# Altium PCB CellVoltageControl.PcbDoc (part 2 of 3)
Units mm, origin at the board's own origin, x right, y up, seen from the top; angles counter-clockwise.
Board outline 100.01 x 50.02 mm, 2 copper layers (Top Layer, Bottom Layer); 240 components, 246 nets, 730 pads, 332 vias.
Unrouted connection lines stored in the file: 5.
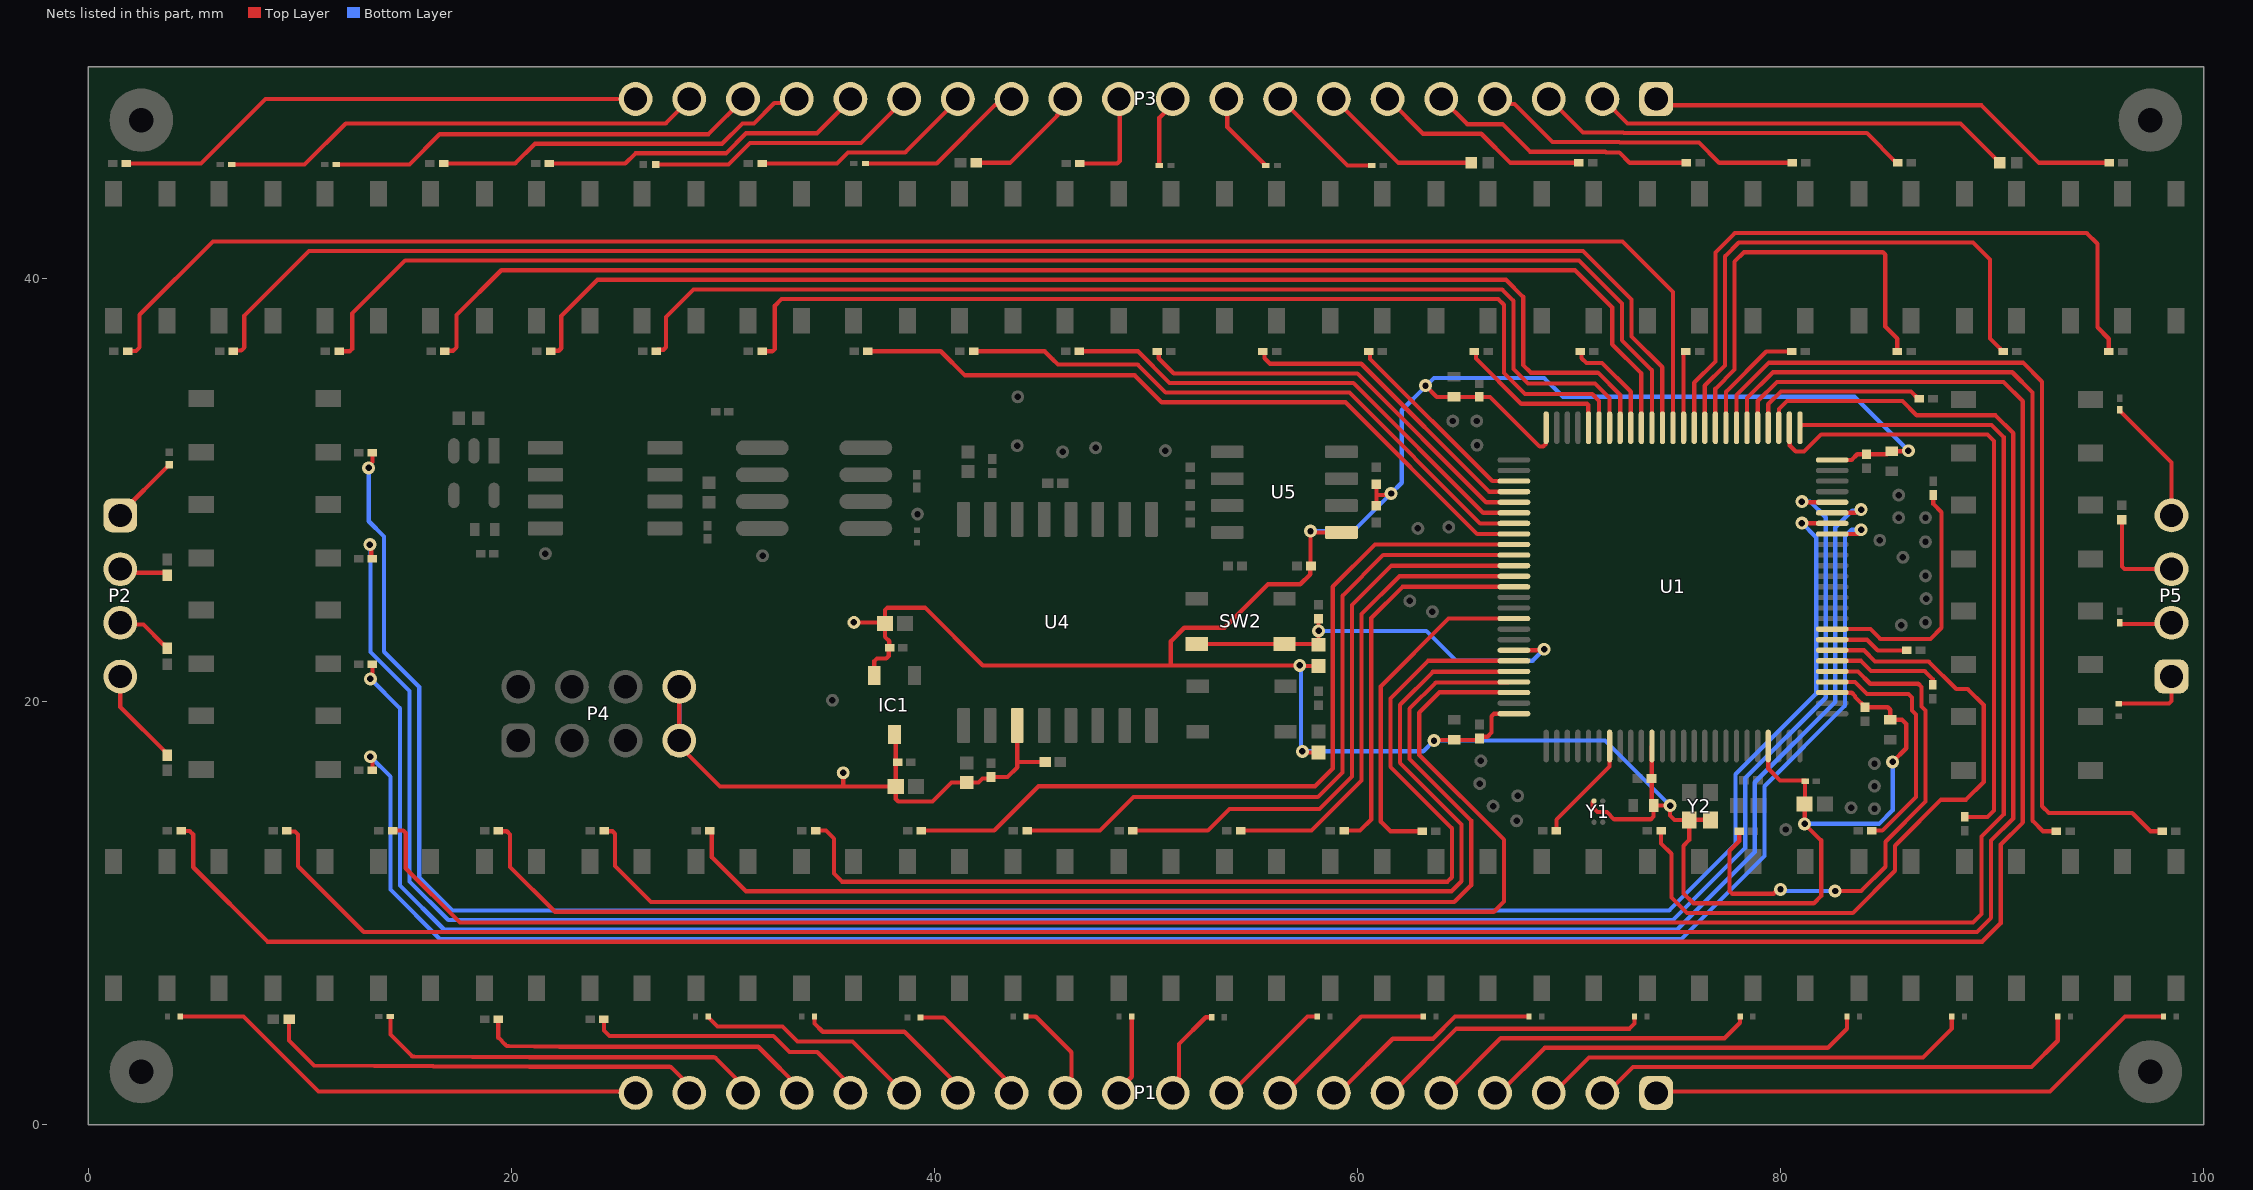
[diagram p2: the nets of this part, all layers, seen from the top]

## Part data (continued)
R1_CellSelectModule1 R1_CellSelectModule2 R1_CellSelectModule3 R1_CellSelectModule4 R1_CellSelectModule5 R1_CellSelectModule6 R1_CellSelectModule7 R1_CellSelectModule8 R1_CellSelectModule9 R1_CellSelectModule10 R1_CellSelectModule11 R1_CellSelectModule12 R1_CellSelectModule13 R1_CellSelectModule14 R1_CellSelectModule15 R1_CellSelectModule16 R1_CellSelectModule17 R1_CellSelectModule18 R1_CellSelectModule19 R1_CellSelectModule20 R1_CellSelectModule21 R1_CellSelectModule22 R1_CellSelectModule23 R1_CellSelectModule24 R1_CellSelectModule25 R1_CellSelectModule26 R1_CellSelectModule27 R1_CellSelectModule28 R1_CellSelectModule29 R1_CellSelectModule30 R1_CellSelectModule31 R1_CellSelectModule32 R1_CellSelectModule33 R1_CellSelectModule34 R1_CellSelectModule35 R1_CellSelectModule36 R1_CellSelectModule37 R1_CellSelectModule38 R1_CellSelectModule39 R1_CellSelectModule40 R1_CellSelectModule41 R1_CellSelectModule42 R1_CellSelectModule43 R1_CellSelectModule44 R1_CellSelectModule45 R1_CellSelectModule46 R1_CellSelectModule47 R1_CellSelectModule48 R39: library part CMP-2004-03546-1, Manufacturer=Panasonic, Part Number=ERJ1GNF4302C
R2 R50: library part ERJ-1GNF1001C, "Resistor", Manufacturer_Name=Panasonic, Mouser Part Number=667-ERJ-1GNF1001C, Arrow Part Number=ERJ-1GNF1001C, Arrow Price/Stock=https://www.arrow.com/en/products/erj-1gnf1001c/panasonic?utm_currency=USD&region=nac, Datasheet Link=https://industrial.panasonic.com/cdbs/www-data/pdf/RDA0000/AOA0000C301.pdf, Height=0.26mm, Manufacturer_Part_Number=ERJ-1GNF1001C, Mouser Price/Stock=https://www.mouser.co.uk/ProductDetail/Panasonic/ERJ-1GNF1001C?qs=nuXzIS8loXFEaL2ux1uJzQ%3D%3D
R3: library part ERJ-1GNF2492C, "Resistor", Manufacturer_Name=Panasonic, Mouser Part Number=667-ERJ-1GNF2492C, Datasheet Link=https://industrial.panasonic.com/cdbs/www-data/pdf/RDA0000/AOA0000C301.pdf, Height=0.26mm, Manufacturer_Part_Number=ERJ-1GNF2492C, Mouser Price/Stock=https://www.mouser.com/Search/Refine.aspx?Keyword=667-ERJ-1GNF2492C
R4: library part CMP-1010-00609-2, Manufacturer=Panasonic, Part Number=ERJ1GNF5102C
R5: library part CMP-1010-00629-2, Manufacturer=Panasonic, Part Number=ERJ-1GNF7682C
R6: library part CMP-2004-03538-1, Manufacturer=Panasonic, Part Number=ERJ1GNF3001C
R7: library part ERJ-1GNF2702C, "Resistor", Manufacturer_Name=Panasonic, Mouser Part Number=667-ERJ-1GNF2702C, Datasheet Link=https://industrial.panasonic.com/cdbs/www-data/pdf/RDA0000/AOA0000C301.pdf, Height=0.26mm, Manufacturer_Part_Number=ERJ-1GNF2702C, Mouser Price/Stock=https://www.mouser.com/Search/Refine.aspx?Keyword=667-ERJ-1GNF2702C
R8: library part CMP-1010-00612-1, "53K6 0.05W 1% 0201 (0603 Metric)  SMD", Case-EIA=0201, Case-Metric=0603, Power="0.05 W", Tolerance="1 %", Technology=SMT
R9: library part CMP-2004-03417-1, Manufacturer=Panasonic, Part Number=ERJ-1GNF7872C
R10: library part CMP-2004-03370-1, Manufacturer=Panasonic, Part Number=ERJ-1GNF4991C
R11: library part ERJ-1GNF2942C, "Resistor", Manufacturer_Name=Panasonic, Mouser Part Number=667-ERJ-1GNF2942C, Arrow Part Number=ERJ-1GNF2942C, Arrow Price/Stock=https://www.arrow.com/en/products/erj-1gnf2942c/panasonic, Datasheet Link=https://industrial.panasonic.com/cdbs/www-data/pdf/RDA0000/AOA0000C301.pdf, Height=0.26mm, Manufacturer_Part_Number=ERJ-1GNF2942C, Mouser Price/Stock=https://www.mouser.co.uk/ProductDetail/Panasonic/ERJ-1GNF2942C?qs=nuXzIS8loXGe%252BX5VKurVfQ%3D%3D
R12: library part CMP-1010-00613-2, Manufacturer=Panasonic, Part Number=ERJ-1GNF5492C
R13: library part CMP-1010-00631-1, "80K6 0.05W 1% 0201 (0603 Metric)  SMD", Case-EIA=0201, Case-Metric=0603, Power="0.05 W", Tolerance="1 %", Technology=SMT
R14: library part CMP-2004-03407-1, Manufacturer=Panasonic, Part Number=ERJ-1GNF6981C
R15: library part ERJ-1GNF3092C, "Resistor", Manufacturer_Name=Panasonic, Mouser Part Number=667-ERJ-1GNF3092C, Datasheet Link=https://industrial.panasonic.com/cdbs/www-data/pdf/RDA0000/AOA0000C301.pdf, Height=0.26mm, Manufacturer_Part_Number=ERJ-1GNF3092C, Mouser Price/Stock=https://www.mouser.com/Search/Refine.aspx?Keyword=667-ERJ-1GNF3092C
R16: library part CMP-2004-03020-1, Manufacturer=Panasonic, Part Number=ERJ-1GEF5762C
R17: library part CMP-1010-00633-2, Manufacturer=Panasonic, Part Number=ERJ-1GNF8252C
R18: library part CMP-2004-03433-1, Manufacturer=Panasonic, Part Number=ERJ-1GNF9091C
R19: library part ERJ-1GNF3302C, "Resistor", Manufacturer_Name=Panasonic, Mouser Part Number=667-ERJ-1GNF3302C, Datasheet Link=https://industrial.panasonic.com/cdbs/www-data/pdf/RDA0000/AOA0000C301.pdf, Height=0.26mm, Manufacturer_Part_Number=ERJ-1GNF3302C, Mouser Price/Stock=https://www.mouser.co.uk/ProductDetail/Panasonic/ERJ-1GNF3302C?qs=nuXzIS8loXGkny9nADUO%252BQ%3D%3D
R20: library part CMP-2004-03025-1, Manufacturer=Panasonic, Part Number=ERJ-1GEF5902C
R21: library part CMP-2004-03424-1, Manufacturer=Panasonic, Part Number=ERJ-1GNF8452C
R22: library part ERJ-1GNF1102C, "Resistor", Manufacturer_Name=Panasonic, Datasheet Link=https://industrial.panasonic.com/cdbs/www-data/pdf/RDA0000/AOA0000C301.pdf, Height=0.26mm, Manufacturer_Part_Number=ERJ-1GNF1102C
R23: library part ERJ-1GNF3482C, "Resistor", Manufacturer_Name=Panasonic, Mouser Part Number=667-ERJ-1GNF3482C, Datasheet Link=https://industrial.panasonic.com/cdbs/www-data/pdf/RDA0000/AOA0000C301.pdf, Height=0.26mm, Manufacturer_Part_Number=ERJ-1GNF3482C, Mouser Price/Stock=https://www.mouser.com/Search/Refine.aspx?Keyword=667-ERJ-1GNF3482C
R24: library part CMP-2004-03397-1, Manufacturer=Panasonic, Part Number=ERJ-1GNF6192C
R25: library part CMP-1010-00635-2, Manufacturer=Panasonic, Part Number=ERJ-1GNF8662C
R26: library part ERJ-1GNF1302C, "Resistor", Manufacturer_Name=Panasonic, Arrow Part Number=ERJ-1GNF1302C, Arrow Price/Stock=https://www.arrow.com/en/products/erj-1gnf1302c/panasonic, Datasheet Link=https://industrial.panasonic.com/cdbs/www-data/pdf/RDA0000/AOA0000C301.pdf, Height=0.26mm, Manufacturer_Part_Number=ERJ-1GNF1302C
R27: library part ERJ-1GNF3742C, "Resistor", Manufacturer_Name=Panasonic, Mouser Part Number=667-ERJ-1GNF3742C, Arrow Part Number=ERJ-1GNF3742C, Arrow Price/Stock=https://www.arrow.com/en/products/erj-1gnf3742c/panasonic?utm_currency=USD&region=nac, Datasheet Link=https://industrial.panasonic.com/cdbs/www-data/pdf/RDA0000/AOA0000C301.pdf, Height=0.26mm, Manufacturer_Part_Number=ERJ-1GNF3742C, Mouser Price/Stock=https://www.mouser.co.uk/ProductDetail/Panasonic/ERJ-1GNF3742C?qs=nuXzIS8loXEad9H565qrAg%3D%3D
R28: library part CMP-1010-00620-1, "63K4 0.05W 1% 0201 (0603 Metric)  SMD", Case-EIA=0201, Case-Metric=0603, Power="0.05 W", Tolerance="1 %", Technology=SMT
R29: library part CMP-2004-03430-1, Manufacturer=Panasonic, Part Number=ERJ-1GNF8872C
R30: library part ERJ-1GJF1502C, "Resistor", Manufacturer_Name=Panasonic, Mouser Part Number=667-ERJ-1GJF1502C, Arrow Part Number=ERJ-1GJF1502C, Arrow Price/Stock=https://www.arrow.com/en/products/erj-1gjf1502c/panasonic?utm_currency=USD&region=nac, Datasheet Link=https://industrial.panasonic.com/cdbs/www-data/pdf/RDA0000/AOA0000C304.pdf, Height=0.26mm, Manufacturer_Part_Number=ERJ-1GJF1502C, Mouser Price/Stock=https://www.mouser.co.uk/ProductDetail/Panasonic/ERJ-1GJF1502C?qs=OcgtsXO%252B3gsxVA8R4OwezA%3D%3D
R31: library part ERJ-1GNF3902C, "Resistor", Manufacturer_Name=Panasonic, Mouser Part Number=667-ERJ-1GNF3902C, Arrow Part Number=ERJ-1GNF3902C, Arrow Price/Stock=https://www.arrow.com/en/products/erj-1gnf3902c/panasonic, Datasheet Link=https://industrial.panasonic.com/cdbs/www-data/pdf/RDA0000/AOA0000C301.pdf, Height=0.26mm, Manufacturer_Part_Number=ERJ-1GNF3902C, Mouser Price/Stock=https://www.mouser.co.uk/ProductDetail/Panasonic/ERJ-1GNF3902C?qs=nuXzIS8loXHDGgRLL9kxuw%3D%3D
R32: library part CMP-2004-03399-1, Manufacturer=Panasonic, Part Number=ERJ-1GNF6492C
R33: library part CMP-2004-03561-1, Manufacturer=Panasonic, Part Number=ERJ1GNF9102C
R34: library part ERJ-1GNF1692C, "Resistor", Manufacturer_Name=Panasonic, Mouser Part Number=667-ERJ-1GNF1692C, Datasheet Link=https://industrial.panasonic.com/cdbs/www-data/pdf/RDA0000/AOA0000C301.pdf, Height=0.26mm, Manufacturer_Part_Number=ERJ-1GNF1692C, Mouser Price/Stock=https://www.mouser.co.uk/ProductDetail/Panasonic/ERJ-1GNF1692C?qs=nuXzIS8loXF5YjzhgcakNQ%3D%3D
R35: library part ERJ-1GNF4122C, "Resistor", Manufacturer_Name=Panasonic, Datasheet Link=https://industrial.panasonic.com/cdbs/www-data/pdf/RDA0000/AOA0000C301.pdf, Height=0.26mm, Manufacturer_Part_Number=ERJ-1GNF4122C
R36: library part CMP-2004-03066-1, Manufacturer=Panasonic, Part Number=ERJ-1GEF6982C
R37: library part CMP-1010-00639-1, "93K1 0.05W 1% 0201 (0603 Metric)  SMD", Case-EIA=0201, Case-Metric=0603, Power="0.05 W", Tolerance="1 %", Technology=SMT
R38: library part ERJ-1GNF1912C, "Resistor", Manufacturer_Name=Panasonic, Mouser Part Number=667-ERJ-1GNF1912C, Datasheet Link=https://industrial.panasonic.com/cdbs/www-data/pdf/RDA0000/AOA0000C301.pdf, Height=0.26mm, Manufacturer_Part_Number=ERJ-1GNF1912C, Mouser Price/Stock=https://www.mouser.com/Search/Refine.aspx?Keyword=667-ERJ-1GNF1912C
R40: library part CMP-1010-00626-2, Manufacturer=Panasonic, Part Number=ERJ-1GNF7152C
R41: library part CMP-2004-03438-1, Manufacturer=Panasonic, Part Number=ERJ-1GNF9532C
R42: library part ERJ-1GNF2102C, "Resistor", Manufacturer_Name=Panasonic, Mouser Part Number=667-ERJ-1GNF2102C, Datasheet Link=https://industrial.panasonic.com/cdbs/www-data/pdf/RDA0000/AOA0000C301.pdf, Height=0.26mm, Manufacturer_Part_Number=ERJ-1GNF2102C, Mouser Price/Stock=https://www.mouser.co.uk/ProductDetail/Panasonic/ERJ-1GNF2102C?qs=nuXzIS8loXF4rN4MRKzadQ%3D%3D
R43: library part CMP-1010-00603-1, "45K3 0.05W 1% 0201 (0603 Metric)  SMD", Case-EIA=0201, Case-Metric=0603, Power="0.05 W", Tolerance="1 %", Technology=SMT
R44: library part CMP-2004-03413-1, Manufacturer=Panasonic, Part Number=ERJ-1GNF7322C
R45: library part CMP-1010-00641-2, Manufacturer=Panasonic, Part Number=ERJ-1GNF9762C
R46: library part ERJ-1GNF2322C, "Resistor", Manufacturer_Name=Panasonic, Datasheet Link=https://industrial.panasonic.com/cdbs/www-data/pdf/RDA0000/AOA0000C301.pdf, Height=0.26mm, Manufacturer_Part_Number=ERJ-1GNF2322C
R47: library part CMP-2004-02976-1, Manufacturer=Panasonic, Part Number=ERJ-1GEF4872C
R48: library part CMP-1010-00628-2, Manufacturer=Panasonic, Part Number=ERJ1GNF7502C
R49 R53 R54: library part CMP-2004-03446-2, "RES SMD 100K OHM 1% 1/20W 0201", Case Code (Imperial)=0201, Case Code (Metric)=0603, Max Operating Temperature=125°C, Max Power Dissipation=50mW, Min Operating Temperature=-55°C, Package Quantity=15000, Resistance=100kR, Temperature Coefficient=200ppm/°C, Tolerance=1%, Voltage Rating=25V, Case/Package=0201, Composition="Thick Film", Contact Plating=Tin, Height=0.01inch, Lead Free="Lead Free", Length=0.024inch, Mount="Surface Mount", Number of Pins=2, Number of Terminations=2, Packaging="Tape and Reel", Power Rating=50mW, Radiation Hardening=No, REACH SVHC="No SVHC", Termination=SMD/SMT, Voltage Rating (DC)=25V, Weight=6E-06oz, Width=0.012inch
R51 R52: library part CMP-2002-00433-1, Manufacturer=Panasonic, Part Number=ERJ-2GEJ103X
R55 R56 R57 R58: library part CMP-2002-01154-4, "Chip Resistor, 4.7 KOhm, +/- 1%, 0.1 W, -55 to 155 degC, 0402 (1005 Metric), RoHS, Tape and Reel", Case Code (Imperial)=0402, Case Code (Metric)=1005, Max Operating Temperature="155 degC", Min Operating Temperature="-55 degC", Package Quantity=1, PartNumber=ERJ-2RKF4701X, Power Rating="100 mW", Resistance="4.7 KOhm", Tolerance=1%, Voltage Rating="50 V", Case\/Package=0402, ComponentLink1Description="Manufacturer URL", ComponentLink1URL=http://www.panasonic.com/, ComponentLink2Description=Datasheet, ComponentLink2URL=http://industrial.panasonic.com/cdbs/www-data/pdf/RDA0000/AOA0000C86.pdf, DatasheetVersion=04/2015, Height="0.35 mm", Length="1 mm", Mount="Surface Mount", Mounting Technology="Surface Mount", PackageDescription="2-Pin Surface Mount Device, Body 1 x 0.5 mm", PackageReference=0402, Packaging="Cut Tape", Pins=2, Radiation Hardening=No, REACH SVHC=Yes, RoHSCompliant=true, Width="0.5 mm"
SW1 SW2: library part CMP-10040-000001-2, "SWITCH TACTILE SPST-NO 0.05A 16V", Case/Package=SMD/SMT, Color=Black, Current Rating=50mA, Max Operating Temperature=85°C, Min Operating Temperature=-40°C, Operating Force=160gf, Package Quantity=2900, Voltage Rating (DC)=16V, Actuator Type=Standard, Contact Plating=Silver, Depth=4.6mm, Illumination Type=Non-Illuminated, Lead Free="Lead Free", Length=3.2mm, Max Current Rating=50mA, Mechanical Life=150000Cycles, Mount="Surface Mount", Orientation=Straight, Packaging="Tape and Reel", RoHS Compliant=Yes, Switch Function=Off-Mom, Switch Travel=0.15mm, Termination=J-Bend, Throw Configuration=SPST
U1: library part CMP-0236-00227-2, "ARM Cortex-M3 32-bit MCU, 128 KB Flash, 32 KB Internal RAM, 83 I/Os, 100-Pin LQFP, -40 to 85 degC, Tape and Reel", I/Os (High Current)=82, Manufacturer=STMicroelectronics, Operating Frequency(F) (Processor speed) (MHz)=32, Package Description="100-Pin Low Profile Quad Flat Package, Body 14 x 14 mm, Pitch 0.5 mm", Package Reference=LQFP100, Supply Voltage(Vcc) min (V)=1.8, ComponentLink1Description="Manufacturer URL", ComponentLink1URL=http://www.st.com/, ComponentLink2Description=Datasheet, ComponentLink2URL=http://www.st.com/st-web-ui/static/active/en/resource/technical/document/datasheet/DM00078689.pdf, Core="ARM Cortex-M3", D/A Converter=2, Data E2PROM nom (B)=4096, DatasheetVersion="Rev. 4", FLASH Size (Prog) (kB)=128, Internal RAM Size (kB)=32, Mounting Technology="Surface Mount", Packing="Tape and Reel", PartNumber=STM32L152VBT6ATR
U2: library part CMP-0271-00145-3, "High-Speed, Single-Supply, Rail-to-Rail Operational Amplifier MicroAmplifier(TM) Series, 2.7 to 5.5 V, -40 to 85 degC, 8-pin SOIC (D8), Green (RoHS & no Sb/Br)", Manufacturer="Texas Instruments", Total Supply Voltage(Max)(+5V is 5, +/-5V is 10)=5.5, Total Supply Voltage(Min)(+5V is 5, +/-5V is 10)=2.7, CMRR(Min)(dB)=66, Code_JEDEC=MS-012, ComponentLink1Description="Manufacturer URL", ComponentLink1URL=http://www.ti.com/, ComponentLink2Description=Datasheet, ComponentLink2URL=http://www.ti.com/general/docs/lit/getliterature.tsp?genericPartNumber=OPA350&fileType=pdf, ComponentLink3Description="Package Specification", ComponentLink3URL=http://www.ti.com/litv/pdf/msoi002j, DatasheetVersion=SBOS099C, Eco-Plan="Green (RoHS & no Sb/Br)", IIB(Max)(pA)=10, Iq per channel(Max)(mA)=8.5, Mounting Technology="Surface Mount", Number of Channels=1, Offset Drift(Typ)(uV/C)=4, PackageDescription="8-Pin Plastic Small Outline, Body 4.9 x 3.9 mm, Pitch 1.27 mm", PackageReference=D0008A, PackageVersion="4040047-3/M, 06/2011", PartNumber=OPA350UA, Slew Rate(Typ)(V/us)=22, Sub Family="Low Input Bias Current Amp (<=10pA), Low Offset Voltage Amplifier (<=500uV), Low Supply Voltage Amplifier (<=2.7V), Precision Amplifier", Vio (25C)(Max)(mV)=1, Vn at 1kHz(Typ)(nV/rtHz)=18
U3: library part CMP-0074-00531-5, "IC VREF SERIES 0.05% SOT23-5", Case/Package=SOT-23, Dropout Voltage=175mV, Max Input Voltage=6V, Max Operating Temperature=125°C, Max Output Current=20mA, Max Output Voltage=2.5V, Max Supply Voltage=2.2V, Min Operating Temperature=-40°C, Nominal Supply Current=60uA, Operating Supply Current=100uA, Package Quantity=1000, Temperature Coefficient=20ppm/°C, Tolerance=0.05%, Height=1.02mm, Lead Free="Lead Free", Length=2.92mm, Min Input Voltage=2.2V, Min Output Voltage=2.5V, Mount="Surface Mount", Number of Channels=1, Number of Pins=5, Output Current=20mA, Output Type=Fixed, Output Voltage=2.5V, Packaging="Tape and Reel", Quiescent Current=100uA, Radiation Hardening=No, REACH SVHC="No SVHC", Reference Type=Series, Reference Voltage=2.5V, Series=-, Supply Current=60uA, Termination=SMD/SMT, Width=1.6mm
U4: library part CMP-04910-000064-1, "DC DC CONVERTER 3.3V 5V 500MW"
U5: library part CMP-04872-000011-1, "DGTL ISO 2.5KV 2CH I2C 8SOIC", Ambient Temperature Range High=+125°C, Ambient Temperature Range Low=-40°C, Manufacturer="Texas Instruments", Max Junction Temp=+136°C, Max Supply Voltage=5.5V, Min Supply Voltage=3V, Nominal Supply Current=1.7-3.1mA, Package=D0008A, Temperature="-40°C to +125°C", Automotive=No, Category=IC, ComponentLink2Description=Datasheet, ComponentLink2URL=http://www.ti.com/lit/ds/symlink/iso1540.pdf, Device Class L1="Integrated Circuits (ICs)", Device Class L2="Interface ICs", Device Class L3=unset, Digikey Description="DGTL ISO 2.5KV 2CH I2C 8SOIC", Height=1.75mm, Interface=I2C,SMBus,Other, Ipc Land Pattern Name=SOIC127P600X175-8, Lead Free=Yes, Manufacturer Part Number=ISO1540DR, Mouser Description="Digital Isolators Low-Power,Bidirec I2C Iso", Octopart=https://octopart.com/iso1540dr-texas+instruments-24334113, RoHS=TRUE, Standoff Height=0.11mm, Temperature Range High=+125°C, Temperature Range Low=-40°C
U6: library part CMP-0003-00072-2, "ResolutionPlus 24-Bit, 40 kHz ADC, -40 to 85 degC, 8-pin SOIC (D8), Green (RoHS & no Sb/Br)", Analog Voltage AV/DD(Max)(V)=5.25, Analog Voltage AV/DD(Min)(V)=4.75, Manufacturer="Texas Instruments", # Input Channels=1, Architecture=Delta-Sigma, Code_JEDEC=MS-012, ComponentLink1Description="Manufacturer URL", ComponentLink1URL=http://www.ti.com/, ComponentLink2Description=Datasheet, ComponentLink2URL=http://www.ti.com/general/docs/lit/getliterature.tsp?genericPartNumber=ADS1252&fileType=pdf, ComponentLink3Description="Package Specification", ComponentLink3URL=http://www.ti.com/litv/pdf/msoi002j, DatasheetVersion=SBAS127D, Digital Supply(Max)(V)=5.25, Digital Supply(Min)(V)=4.75, Eco-Plan="Green (RoHS & no Sb/Br)", INL(Max)(+/-LSB)=1, Interface="Serial SPI", Mounting Technology="Surface Mount", PackageDescription="8-Pin Plastic Small Outline, Body 4.9 x 3.9 mm, Pitch 1.27 mm", PackageReference=D8, PackageVersion="4040047-3/M, 06/2011", PartNumber=ADS1252U, Resolution(Bits)=24, Sample Rate (max)(SPS)=41k, SubFamily="Precision ADC (<=10MSPS)"
Y1: library part CMP-25159-260295-1, "MEMS OSC TCXO 32.7680KHZ LVCMOS", Frequency=32.768kHz, Frequency Stability=5ppm, Max Operating Temperature=70°C, Min Operating Temperature=0°C, Height=0.024inch, Length=0.061inch, Mount="Surface Mount", Packaging="Cut Tape", RoHS Compliant=Yes, Series=SiT1552, Width=0.033inch
Y2: library part CMP-40224-000008-1, "XTAL OSC TCXO 16MHZ 3.3V SMD", Frequency=16MHz, Load Capacitance=15pF, Manufacturer=ECS, Max Supply Current=7mA, Max Supply Voltage=3.63V, Min Supply Voltage=2.97V, Package=TXO-2016, Temperature="-40°C to +85°C", Temperature Range High=+85°C, Temperature Range Low=-40°C, Automotive=No, Category=Crys, ComponentLink2Description=Datasheet, ComponentLink2URL=https://ecsxtal.com/store/pdf/ECS-TXO-2016.pdf, Device Class L1="Passive Components", Device Class L2="Crystals / Oscillators", Device Class L3=Oscillators, Digikey Description="XTAL OSC TCXO 16MHZ 3.3V SMD", Height=0.8mm, Lead Free=Yes, Manufacturer Part Number=ECS-TXO-2016-33-160-TR, Octopart=https://octopart.com/ecs-txo-2016-33-160-tr-ecs+international-102811109, RoHS=TRUE, Series=TXO-2016, Stability=2ppm

## Free pads (board coordinates)
  round 3 hole 1.15: 2(2.5,2.5) 2(2.5,47.5) 2(97.5,2.5) 2(97.5,47.5)

## Via types
v1: diameter 0.6, hole 0.3, Top Layer to Bottom Layer, 207 vias
v2: diameter 0.61, hole 0.305, Top Layer to Bottom Layer, tented both sides, 125 vias

## Nets (pads, with @x,y where several pads share a name; then routed paths per layer and width w, separated by ;. In a path a pad name is that pad's centre, name@x,y a point inside that pad or via, vN(x,y) a via of type N, cw(c..) or ccw(c..) an arc to the next point about the centre after c; other vN are vias at no path point)
3V3: C1.1 C2.2 C3.1 C4.2 C5.1 C6.2 C7.1 C8.2 C9.1 C10.2 C15.1 C16.1 C23.1 C24.1 C31.1 IC1.2 J27.1 R51.1 R52.1 R55.2 R57.2 U1.11 U1.22 U1.28 U1.50 U1.75 U1.100 U5.1 Y1.3 Y2.1 Y2.4 | length 158.3
  Top Layer w0.2: J27.1@36.195,23.749 37.61,23.749 C24.1@37.665,23.694 ; IC1.2@37.161,21.242 37.161,21.921 37.282,22.042 37.724,22.042 37.841,22.16 37.841,22.507 C23.1@37.887,22.552 37.869,22.571 37.869,22.862 37.665,23.066 C24.1@37.665,23.694 ; v2@57.277,21.69 R52.1@58.162,21.69 ; v2(57.277,21.717) 51.181,21.717 ; v2@57.404,17.596 R51.1@58.162,17.596 ; C31.1@57.785,26.567 v2(57.785,28.067) 57.848,28.004 U5.1@59.249,28.004 ; C31.1@57.81,26.416 57.773,26.379 57.773,26.023 57.302,25.552 55.778,25.552 53.721,23.495 51.816,23.495 51.181,22.86 51.181,21.717 ; R55.2@60.903,29.274 60.903,29.776 ; R57.2@60.903,30.278 60.903,29.776 ; v2(61.595,29.845) 61.526,29.776 60.903,29.776 ; v2(63.225,34.946) 63.757,34.414 C2.2@64.567,34.414 C1.1@65.765,34.414 66.276,34.414 68.622,32.068 68.788,32.068 68.92,32.2 68.92,32.947 U1.75@68.93,32.957 ; v2(63.627,18.161) 63.66,18.194 C10.2@64.589,18.194 65.717,18.194 C5.1@65.786,18.263 65.862,18.339 66.143,18.339 66.35,18.546 66.35,19.315 66.467,19.432 U1.100@67.405,19.432 ; Y1.3@71.12,15.24 71.12,15.014 71.352,14.782 71.802,14.782 72.146,14.438 73.874,14.438 74.008,14.572 C4.2@74.008,15.092 v2@74.782,15.092 ; U1.11@73.93,17.907 73.92,17.897 73.92,15.258 C4.2@74.008,15.17 ; v2(74.788,15.083) 74.788,14.62 75.002,14.406 Y2.4@75.7,14.406 ; Y2.4@75.714,14.419 Y2.4@75.859,14.419 ; Y2.1@76.686,14.419 Y2.4@75.859,14.419 ; U1.22@79.43,17.907 79.43,16.836 79.987,16.279 81.153,16.279 81.169,16.263 81.169,15.188 C16.1@81.153,15.172 v2(81.153,14.224) 81.934,13.443 81.934,10.814 81.588,10.468 75.892,10.468 75.426,10.934 75.426,13.191 75.692,13.457 75.692,14.253 Y2.4@75.859,14.419 ; U1.28@82.455,20.432 82.465,20.422 83.382,20.422 83.532,20.272 83.532,20.229 C9.1@84.023,19.738 ; U1.50@82.455,31.432 83.375,31.432 83.642,31.699 C7.1@84.074,31.699 85.051,31.699 85.196,31.844 C6.2@85.271,31.844 86.073,31.844 v2@86.106,31.877 ; C9.1@84.003,19.738 85.083,19.738 85.2,19.62 C8.2@85.2,19.149 85.753,19.149 85.96,18.942 85.96,17.799 v2(85.315,17.154) ; C24.1@37.665,23.694 37.665,24.33 37.782,24.447 39.561,24.447 42.291,21.717 51.181,21.717
  Bottom Layer w0.2: v2(57.277,21.717) 57.34,21.653 57.34,17.716 v2(57.404,17.653) 63.119,17.653 v2(63.627,18.161) 71.71,18.161 v2(74.788,15.083) ; v2(57.785,28.067) 59.817,28.067 v2(61.595,29.845) 62.103,30.353 62.103,33.782 63.225,34.904 v2(63.225,34.946) ; v2@63.246,34.925 63.627,35.306 68.834,35.306 69.723,34.417 83.511,34.417 v2(86.062,31.866) ; v2(81.153,14.224) 84.67,14.224 85.315,14.869 v2(85.315,17.154)
5V: C25.1 C26.1 C27.2 C28.2 IC1.3 J34.1 P4.7 P4.8 R54.2 U4.3 | length 29.8
  Top Layer w0.2: P4.8@27.94,20.701 P4.7@27.94,18.161 27.94,17.907 29.858,15.989 35.687,15.989 ; J34.1@35.687,16.637 35.687,15.989 ; IC1.3@38.111,18.442 38.173,18.38 C25.1@38.173,15.989 ; U4.3@43.919,18.874 43.919,17.145 ; R54.2@45.239,17.145 43.919,17.145 ; 35.687,15.989 C25.1@38.173,15.989 ; C25.1@38.173,15.989 38.173,15.397 38.29,15.279 39.917,15.279 40.815,16.177 C27.2@41.529,16.177 42.085,16.177 42.279,16.371 42.609,16.371 C28.2@42.672,16.434 43.458,16.434 43.919,16.895 43.919,17.145
  Bottom Layer w0.2: P4.7@27.94,18.161 P4.8@27.94,20.701
BOOT0: C12.1 R52.2 SW2.3 SW2.4 U1.94 | length 20
  Top Layer w0.2: SW2.3@52.404,22.723 SW2.4@56.554,22.723 57.94,22.723 R52.2@58.162,22.944 ; R52.2@58.162,22.69 R52.2@58.162,22.944 ; C12.1@58.162,23.925 58.166,23.921 58.166,23.353 v2(58.169,23.349) 58.162,23.342 R52.2@58.162,22.944 ; U1.94@67.405,22.432 68.787,22.432 v2(68.834,22.479)
  Bottom Layer w0.2: v2(58.169,23.349) 63.265,23.349 64.672,21.942 68.297,21.942 v2(68.834,22.479)
cCell-1: R1_CellSelectModule48.1 U1.55 | length 129.2
  Top Layer w0.2: R1_CellSelectModule48.1@4.382,13.905 4.402,13.884 4.785,13.884 4.953,13.716 4.953,12.171 8.472,8.652 89.551,8.652 90.426,9.527 90.426,13.25 91.471,14.294 91.471,34.204 90.551,35.124 79.842,35.124 78.938,34.219 78.938,32.965 U1.55@78.93,32.957
cCell-2: R1_CellSelectModule12.1 U1.53 | length 119.8
  Top Layer w0.2: R1_CellSelectModule12.1@9.382,13.905 9.426,13.86 9.762,13.86 9.906,13.716 9.906,12.218 13.018,9.106 89.297,9.106 89.97,9.779 89.97,13.436 91.017,14.482 91.017,32.699 90.175,33.541 86.456,33.541 85.78,34.216 80.317,34.216 79.94,33.839 79.94,32.967 U1.53@79.93,32.957
cCell-3: R1_CellSelectModule11.1 U1.51 | length 111
  Top Layer w0.2: R1_CellSelectModule11.1@14.382,13.905 14.886,13.905 15.003,13.787 15.003,12.121 17.564,9.56 89.109,9.56 89.516,9.967 89.516,13.624 90.563,14.67 90.563,32.511 89.987,33.087 80.953,33.087 80.953,32.98 U1.51@80.93,32.957
cCell-4: R1_CellSelectModule10.1 U1.98 | length 65.4
  Top Layer w0.2: R1_CellSelectModule10.1@19.382,13.905 19.409,13.877 19.778,13.877 19.939,13.716 19.939,12.185 22.056,10.068 66.456,10.068 66.934,10.546 66.934,13.477 62.927,17.484 62.927,19.483 63.891,20.447 66.705,20.447 66.71,20.442 67.11,20.442 U1.98@67.115,20.447
cCell-5: R1_CellSelectModule9.1 U1.97 | length 58.4
  Top Layer w0.2: R1_CellSelectModule9.1@24.382,13.905 24.413,13.874 24.775,13.874 24.892,13.756 24.892,12.232 26.602,10.522 64.582,10.522 65.382,11.322 65.382,14.387 62.473,17.296 62.473,19.671 63.713,20.911 66.699,20.911 66.71,20.922 67.123,20.922 U1.97@67.134,20.911
cCell-6: R1_CellSelectModule8.1 U1.96 | length 53
  Top Layer w0.2: R1_CellSelectModule8.1@29.399,13.905 29.474,13.83 29.474,12.65 31.087,11.036 64.455,11.036 64.928,11.51 64.928,14.199 62.019,17.108 62.019,19.859 63.571,21.411 66.699,21.411 66.71,21.422 67.162,21.422 U1.96@67.174,21.411
cCell-7: R1_CellSelectModule7.1 U1.95 | length 47.8
  Top Layer w0.2: R1_CellSelectModule7.1@34.382,13.905 34.873,13.905 35.253,13.525 35.253,11.87 35.633,11.49 64.267,11.49 64.474,11.698 64.474,14.011 61.565,16.92 61.565,20.156 63.341,21.932 U1.95@66.86,21.932
cCell-8: R1_CellSelectModule6.1 U1.84 | length 38.7
  Top Layer w0.2: R1_CellSelectModule6.1@39.382,13.905 42.831,13.905 44.928,16.002 57.999,16.002 58.841,16.844 58.841,25.44 60.833,27.432 U1.84@67.405,27.432
cCell-9: R1_CellSelectModule5.1 U1.85 | length 33.3
  Top Layer w0.2: R1_CellSelectModule5.1@44.382,13.905 47.831,13.905 49.42,15.494 58.133,15.494 59.295,16.656 59.295,25.005 61.222,26.932 U1.85@67.405,26.932
cCell-10: R1_CellSelectModule4.1 U1.86 | length 28
  Top Layer w0.2: R1_CellSelectModule4.1@49.382,13.905 52.932,13.905 53.96,14.932 58.213,14.932 59.749,16.468 59.749,24.57 61.611,26.432 U1.86@67.405,26.432
cCell-11: R1_CellSelectModule3.1 U1.87 | length 22.5
  Top Layer w0.2: R1_CellSelectModule3.1@54.483,13.905 57.828,13.905 60.203,16.28 60.203,24.142 61.993,25.932 U1.87@67.405,25.932
cCell-12: R1_CellSelectModule2.1 U1.88 | length 18.4
  Top Layer w0.2: R1_CellSelectModule2.1@59.38,13.905 60.133,13.905 60.657,14.429 60.657,23.954 62.135,25.432 U1.88@67.405,25.432
cCell-13: R1_CellSelectModule1.1 U1.91 | length 16.2
  Top Layer w0.2: R1_CellSelectModule1.1@63.061,13.874 61.564,13.874 61.111,14.327 61.111,20.725 64.318,23.932 U1.91@67.405,23.932
cCell-14: R1_CellSelectModule23.1 U1.7 | length 5
  Top Layer w0.2: R1_CellSelectModule23.1@69.413,13.905 69.413,14.422 71.93,16.939 U1.7@71.93,17.907
cCell-15: R1_CellSelectModule22.1 U1.32 | length 33.6
  Top Layer w0.2: R1_CellSelectModule22.1@74.366,13.905 74.366,13.299 74.857,12.808 74.857,10.741 75.584,10.014 83.432,10.014 85.426,12.008 85.426,13.191 85.633,13.398 87.602,15.367 88.78,15.367 89.621,16.208 89.621,18.748 89.621,19.841 88.86,20.602 88.319,20.602 87.016,21.905 86.353,21.905 84.483,21.905 83.956,22.432 U1.32@82.455,22.432
cCell-16: R1_CellSelectModule21.1 U1.30 | length 24.9
  Top Layer w0.2: R1_CellSelectModule21.1@78.061,13.874 78.061,13.418 77.597,12.954 77.597,11.049 77.724,10.922 79.694,10.922 79.899,11.127 v2(80.01,11.127) ; U1.30@82.455,21.432 83.672,21.432 84.257,20.847 86.524,20.847 86.678,20.693 86.678,19.777 86.868,19.587 86.868,15.275 84.972,13.379 84.972,12.196 83.825,11.049 v2(82.593,11.049)
  Bottom Layer w0.2: v2(80.01,11.127) 80.088,11.049 v2(82.593,11.049)
cCell-17: R1_CellSelectModule20.1 U1.29 | length 11.6
  Top Layer w0.2: U1.29@82.455,20.932 83.53,20.932 84.098,20.364 86.062,20.364 86.224,20.202 86.224,19.588 86.414,19.398 86.414,15.492 86.224,15.302 84.827,13.905 R1_CellSelectModule20.1@84.328,13.905
cCell-18: R1_CellSelectModule19.1 U1.52 | length 30.1
  Top Layer w0.2: U1.52@80.43,32.957 80.44,32.947 80.44,32.262 80.451,32.251 80.451,32.109 80.732,31.828 81.128,31.828 81.933,32.633 89.799,32.633 90.109,32.323 90.109,14.858 89.799,14.549 R1_CellSelectModule19.1@88.726,14.549
cCell-19: R1_CellSelectModule18.1 U1.56 | length 37.4
  Top Layer w0.2: U1.56@78.43,32.957 78.432,32.959 78.432,34.356 79.654,35.578 90.968,35.578 91.925,34.621 91.925,14.374 92.425,13.874 R1_CellSelectModule18.1@93.061,13.874
cCell-20: R1_CellSelectModule17.1 U1.57 | length 43.2
  Top Layer w0.2: U1.57@77.93,32.957 77.93,34.496 79.466,36.032 91.476,36.032 92.379,35.129 92.379,15.054 92.7,14.732 96.647,14.732 97.505,13.874 R1_CellSelectModule17.1@98.061,13.874
cCell-21: R1_CellSelectModule16.1 U1.31 | length 5.4
  Top Layer w0.2: U1.31@82.455,21.932 83.814,21.932 84.295,21.451 86.828,21.451 87.207,21.072 R1_CellSelectModule16.1@87.207,20.798
cCell-22: R1_CellSelectModule15.1 U1.33 | length 3.7
  Top Layer w0.2: U1.33@82.455,22.932 84.098,22.932 84.608,22.422 R1_CellSelectModule15.1@85.969,22.422
cCell-23: R1_CellSelectModule14.1 U1.34 | length 12
  Top Layer w0.2: U1.34@82.455,23.432 84.264,23.432 84.733,22.963 87.098,22.963 87.63,23.495 87.63,28.956 87.238,29.348 R1_CellSelectModule14.1@87.238,29.774
cCell-24: R1_CellSelectModule13.1 U1.54 | length 8.6
  Top Layer w0.2: U1.54@79.43,32.957 79.43,34.07 80.03,34.67 86.177,34.67 86.522,34.325 R1_CellSelectModule13.1@86.572,34.325
cCell-25: R1_CellSelectModule24.1 U1.61 | length 32.7
  Top Layer w0.2: U1.61@75.93,32.957 75.93,35.087 76.934,36.091 76.934,41.247 77.851,42.164 94.488,42.164 94.996,41.656 94.996,37.704 95.535,37.165 R1_CellSelectModule24.1@95.535,36.561
cCell-26: R1_CellSelectModule36.1 U1.60 | length 26.3
  Top Layer w0.2: U1.60@76.43,32.957 76.43,34.945 77.388,35.903 77.388,41.059 78.039,41.71 89.11,41.71 89.916,40.904 89.916,37.18 90.41,36.686 90.41,36.636 90.485,36.561 R1_CellSelectModule36.1@90.535,36.561
cCell-27: R1_CellSelectModule35.1 U1.59 | length 20.4
  Top Layer w0.2: U1.59@76.93,32.957 76.93,34.794 77.842,35.706 77.842,40.808 78.29,41.256 84.846,41.256 84.963,41.139 84.963,37.737 85.535,37.165 R1_CellSelectModule35.1@85.535,36.561
cCell-28: R1_CellSelectModule34.1 U1.58 | length 5.6
  Top Layer w0.2: U1.58@77.43,32.957 77.43,34.652 79.339,36.561 R1_CellSelectModule34.1@80.535,36.561
cCell-29: R1_CellSelectModule33.1 U1.62 | length 3.7
  Top Layer w0.2: U1.62@75.43,32.957 75.43,36.486 75.505,36.561 R1_CellSelectModule33.1@75.535,36.561
cCell-30: R1_CellSelectModule32.1 U1.67 | length 5
  Top Layer w0.2: R1_CellSelectModule32.1@70.535,36.561 70.606,36.49 70.606,36.239 70.831,36.014 71.576,36.014 72.93,34.66 U1.67@72.93,32.957
cCell-31: R1_CellSelectModule31.1 U1.71 | length 7.7
  Top Layer w0.2: R1_CellSelectModule31.1@65.535,36.561 65.606,36.49 65.606,36.227 67.747,34.086 70.866,34.086 70.92,34.032 70.92,32.967 U1.71@70.93,32.957
cCell-32: R1_CellSelectModule30.1 U1.78 | length 9.6
  Top Layer w0.2: R1_CellSelectModule30.1@60.535,36.561 60.606,36.49 60.606,36.203 66.377,30.432 U1.78@67.405,30.432
cCell-33: R1_CellSelectModule29.1 U1.79 | length 14.8
  Top Layer w0.2: R1_CellSelectModule29.1@55.535,36.561 55.606,36.49 55.606,36.239 55.866,35.979 60.188,35.979 66.235,29.932 U1.79@67.405,29.932
cCell-34: R1_CellSelectModule28.1 U1.80 | length 20
  Top Layer w0.2: R1_CellSelectModule28.1@50.535,36.561 50.606,36.49 50.606,36.239 51.32,35.525 60,35.525 66.093,29.432 U1.80@67.405,29.432
cCell-35: R1_CellSelectModule27.1 U1.81 | length 23.7
  Top Layer w0.2: R1_CellSelectModule27.1@46.856,36.572 49.623,36.572 51.124,35.071 59.812,35.071 65.951,28.932 U1.81@67.405,28.932
cCell-36: R1_CellSelectModule26.1 U1.82 | length 28.9
  Top Layer w0.2: R1_CellSelectModule26.1@41.856,36.572 45.216,36.572 45.593,36.195 45.847,35.941 49.612,35.941 50.936,34.617 59.624,34.617 65.809,28.432 U1.82@67.405,28.432
cCell-37: R1_CellSelectModule25.1 U1.83 | length 34.1
  Top Layer w0.2: R1_CellSelectModule25.1@36.856,36.572 40.305,36.572 41.444,35.433 49.478,35.433 50.748,34.163 59.436,34.163 65.667,27.932 U1.83@67.405,27.932
cCell-38: R1_CellSelectModule47.1 U1.70 | length 47
  Top Layer w0.2: R1_CellSelectModule47.1@31.847,36.567 32.339,36.567 32.456,36.684 32.456,38.726 32.771,39.041 66.66,39.041 66.934,38.768 66.934,35.541 67.931,34.544 71.106,34.544 71.43,34.22 U1.70@71.43,32.957
cCell-39: R1_CellSelectModule46.1 U1.69 | length 52.6
  Top Layer w0.2: R1_CellSelectModule46.1@26.847,36.567 26.922,36.642 27.193,36.642 27.31,36.759 27.31,38.193 28.613,39.495 66.848,39.495 67.388,38.956 67.388,35.729 68.065,35.052 71.24,35.052 71.93,34.362 U1.69@71.93,32.957
cCell-40: R1_CellSelectModule45.1 U1.68 | length 58.6
  Top Layer w0.2: R1_CellSelectModule45.1@21.847,36.567 21.878,36.598 22.24,36.598 22.357,36.715 22.357,38.24 24.067,39.949 67.036,39.949 67.842,39.144 67.842,35.917 68.199,35.56 71.374,35.56 72.43,34.504 U1.68@72.43,32.957
cCell-41: R1_CellSelectModule44.1 U1.66 | length 64.7
  Top Layer w0.2: R1_CellSelectModule44.1@16.847,36.567 16.875,36.595 17.244,36.595 17.404,36.755 17.404,38.287 19.521,40.403 70.298,40.403 72.058,38.644 72.058,36.898 73.43,35.526 U1.66@73.43,32.957
cCell-42: R1_CellSelectModule43.1 U1.65 | length 70.7
  Top Layer w0.2: R1_CellSelectModule43.1@11.847,36.567 12.351,36.567 12.468,36.684 12.468,38.351 14.975,40.857 70.486,40.857 72.512,38.832 72.512,37.086 73.93,35.668 U1.65@73.93,32.957
cCell-43: R1_CellSelectModule42.1 U1.64 | length 76.6
  Top Layer w0.2: R1_CellSelectModule42.1@6.847,36.567 6.891,36.611 7.227,36.611 7.371,36.755 7.371,38.254 10.429,41.311 70.674,41.311 72.966,39.02 72.966,37.274 74.422,35.818 74.422,32.965 U1.64@74.43,32.957
cCell-44: R1_CellSelectModule41.1 U1.63 | length 83.5
  Top Layer w0.2: R1_CellSelectModule41.1@1.847,36.567 1.868,36.588 2.251,36.588 2.418,36.755 2.418,38.301 5.883,41.765 72.535,41.765 74.93,39.37 U1.63@74.93,32.957
cCell-45: R1_CellSelectModule40.1 U1.44 | length 103.8
  Top Layer w0.2: v2@13.208,31.115 13.429,31.336 R1_CellSelectModule40.1@13.429,31.764 ; v2(81.026,28.448) 81.034,28.44 82.447,28.44 U1.44@82.455,28.432
  Bottom Layer w0.2: v2(13.251,31.059) 13.251,28.532 13.97,27.813 13.97,22.359 15.64,20.689 15.64,11.686 17.201,10.125 74.747,10.125 77.886,13.264 77.886,16.566 81.696,20.376 81.696,27.778 v2(81.026,28.448)
cCell-46: R1_CellSelectModule39.1 U1.46 | length 102.8
  Top Layer w0.2: v2(13.311,27.432) 13.37,27.373 13.37,26.823 R1_CellSelectModule39.1@13.429,26.764 ; v2(81.026,29.464) 81.058,29.432 U1.46@82.455,29.432
  Bottom Layer w0.2: v2(13.311,27.432) 13.335,27.408 13.335,22.352 15.186,20.501 15.186,11.498 17.013,9.671 74.935,9.671 78.34,13.076 78.34,16.378 82.15,20.188 82.15,28.721 81.407,29.464 v2(81.026,29.464)
cCell-47: R1_CellSelectModule38.1 U1.45 | length 97.4
  Top Layer w0.2: v2(13.335,21.082) 13.429,21.176 R1_CellSelectModule38.1@13.429,21.764 ; U1.45@82.455,28.932 83.558,28.932 83.709,29.083 v2(83.82,29.083)
  Bottom Layer w0.2: v2(13.335,21.082) 14.732,19.685 14.732,11.31 16.825,9.217 75.123,9.217 78.794,12.888 78.794,16.19 82.604,20 82.604,28.248 83.402,29.046 83.783,29.046 v2(83.82,29.083)
cCell-48: R1_CellSelectModule37.1 U1.43 | length 94.1
  Top Layer w0.2: v2(13.335,17.399) 13.429,17.305 R1_CellSelectModule37.1@13.429,16.764 ; U1.43@82.455,27.932 83.685,27.932 83.82,28.067 v2(83.82,28.13) v2@83.82,28.194
  Bottom Layer w0.2: v2(13.335,17.399) 14.278,16.456 14.278,11.122 16.637,8.763 75.311,8.763 79.248,12.7 79.248,16.002 83.058,19.812 83.058,27.813 83.376,28.13 v2(83.82,28.13)
Cell-1: P1.20 R2.2 | length 23.3
  Top Layer w0.2: R2.2@4.335,5.111 7.335,5.111 10.876,1.57 P1.20@26.162,1.57
Cell-2: P1.19 R6.2 | length 21.2
  Top Layer w0.2: R6.2@9.488,4.984 9.488,3.974 10.661,2.801 16.299,2.766 ; 16.3,2.766 ccw(c16.303,3.42) 16.303,2.766 cw(c16.303,2.566) 16.304,2.766 20.846,2.737 ccw(c20.854,3.845) 20.854,2.737 27.452,2.737 cw(c27.452,2.537) 27.593,2.679 P1.19@28.702,1.57
Cell-3: P1.18 R10.2 | length 19.1
  Top Layer w0.2: R10.2@14.279,5.111 14.279,4.263 15.316,3.226 15.398,3.226 20.849,3.191 ccw(c20.854,3.845) 20.854,3.191 ; 20.849,3.191 ccw(c20.854,3.845) 20.854,3.191 ; 29.679,3.133 P1.18@31.242,1.57 ; 20.854,3.191 27.452,3.191 29.538,3.191 ; 29.538,3.191 cw(c29.538,2.991) 29.679,3.133 ccw(c29.538,2.991) 29.538,3.191
Cell-4: P1.17 R14.2 | length 16.3
  Top Layer w0.2: R14.2@19.382,4.984 19.382,4.113 19.721,3.774 19.779,3.716 19.86,3.715 22.268,3.683 31.669,3.683 P1.17@33.782,1.57
Cell-5: P1.16 R18.2 | length 13.7
  Top Layer w0.2: R18.2@24.372,4.984 24.372,4.457 24.638,4.191 32.385,4.191 33.147,3.429 34.463,3.429 P1.16@36.322,1.57
Cell-6: P1.15 R22.2 | length 10.7
  Top Layer w0.2: R22.2@29.302,5.111 29.302,5.086 29.743,4.645 32.82,4.645 33.528,3.937 36.133,3.937 P1.15@38.5,1.57
Cell-7: P1.14 R26.2 | length 8.7
  Top Layer w0.2: R26.2@34.335,5.111 34.335,4.781 34.725,4.391 38.581,4.391 P1.14@41.402,1.57
Cell-8: P1.13 R30.2 | length 6
  Top Layer w0.2: R30.2@39.348,5.065 40.447,5.065 P1.13@43.942,1.57
Cell-9: P1.12 R34.2 | length 5
  Top Layer w0.2: R34.2@44.335,5.111 44.717,5.111 ; P1.12@46.482,1.57 46.482,3.346 ; 44.717,5.111 cw(c44.717,4.911) 44.858,5.053 ; 44.717,5.111 cw(c44.717,4.911) 44.856,5.055 cw(c44.717,4.911) 44.858,5.053 ; 44.858,5.053 46.424,3.487 ; 46.424,3.487 cw(c46.282,3.346) 46.482,3.346 ; 46.424,3.487 cw(c46.282,3.346) 46.482,3.346
Cell-10: P1.11 R38.2 | length 3.7
  Top Layer w0.2: P1.11@49.022,1.57 49.022,1.949 49.335,2.262 R38.2@49.335,5.111
Cell-11: P1.10 R42.2 | length 4.3
  Top Layer w0.2: P1.10@51.562,1.57 51.562,3.81 52.832,5.08 R42.2@53.101,5.08
Cell-12: P1.9 R46.2 | length 5.5
  Top Layer w0.2: P1.9@54.102,1.57 57.643,5.111 R46.2@58.112,5.111
Cell-13: P1.8 R3.2 | length 7.9
  Top Layer w0.2: P1.8@56.642,1.57 60.183,5.111 R3.2@63.118,5.111
Cell-14: P1.7 R7.2 | length 10.4
  Top Layer w0.2: P1.7@59.182,1.57 61.676,4.064 63.574,4.064 64.621,5.111 R7.2@68.123,5.111
Cell-15: P1.6 R11.2 | length 13
  Top Layer w0.2: P1.6@61.722,1.57 64.692,4.54 72.866,4.54 73.103,4.777 R11.2@73.103,5.111
Cell-16: P1.5 R15.2 | length 15.5
  Top Layer w0.2: P1.5@64.262,1.57 66.778,4.086 77.365,4.086 78.096,4.817 78.096,5.106 R15.2@78.102,5.111
Cell-17: P1.4 R19.2 | length 18.2
  Top Layer w0.2: P1.4@66.802,1.57 68.864,3.632 82.245,3.632 83.151,4.538 R19.2@83.15,5.111
Cell-18: P1.3 R23.2 | length 20.6
  Top Layer w0.2: P1.3@69.342,1.57 70.95,3.178 86.744,3.178 88.114,4.548 R23.2@88.114,5.111
Cell-19: P1.2 R27.2 | length 23.4
  Top Layer w0.2: P1.2@71.882,1.57 73.036,2.724 91.878,2.724 93.124,3.97 R27.2@93.124,5.111
Cell-20: P1.1 R31.2 | length 25.2
  Top Layer w0.2: P1.1@74.422,1.57 92.756,1.57 96.297,5.111 R31.2@98.124,5.111
Cell-21: P5.1 R35.2 | length 3.7
  Top Layer w0.2: R35.2@96.013,19.91 98.383,19.91 98.5,20.027 P5.1@98.5,21.19
Cell-22: P5.2 R39.2 | length 2.5
  Top Layer w0.2: R39.2@96.013,23.673 P5.2@98.501,23.673
Cell-23: P5.3 R43.2 | length 4.6
  Top Layer w0.2: R43.2@96.159,28.594 96.159,26.387 96.276,26.27 P5.3@98.5,26.27
Cell-24: P5.4 R47.2 | length 6
  Top Layer w0.2: R47.2@96.059,33.798 96.059,33.748 98.5,31.307 P5.4@98.5,28.81
Cell-25: P3.1 R4.2 | length 22.6
  Top Layer w0.2: P3.1@74.168,48.5 74.468,48.2 89.519,48.2 92.238,45.481 R4.2@95.557,45.481
Cell-26: P3.2 R8.2 | length 20
  Top Layer w0.2: P3.2@71.628,48.5 72.782,47.346 88.522,47.346 R8.2@90.387,45.481
Cell-27: P3.3 R12.2 | length 17.7
  Top Layer w0.2: P3.3@69.088,48.5 70.67,46.918 72.568,46.918 72.594,46.892 84.094,46.892 85.504,45.481 R12.2@85.554,45.481
Cell-28: P3.4 R16.2 | length 15.3
  Top Layer w0.2: P3.4@66.548,48.5 66.782,48.266 67.431,48.266 69.233,46.464 72.38,46.464 72.406,46.438 76.157,46.438 77.114,45.481 R16.2@80.565,45.481
Cell-29: P3.5 R20.2 | length 12.8
  Top Layer w0.2: P3.5@64.008,48.5 65.197,47.311 66.862,47.311 68.163,46.01 71.719,46.01 71.755,45.974 72.39,45.974 72.883,45.481 R20.2@75.564,45.481
Cell-30: P3.6 R24.2 | length 10.3
  Top Layer w0.2: P3.6@61.468,48.5 63.111,46.857 65.862,46.857 67.238,45.481 R24.2@70.475,45.481
Cell-31: P3.7 R28.2 | length 7.7
  Top Layer w0.2: P3.7@58.928,48.5 61.947,45.481 R28.2@65.387,45.481
Cell-32: P3.8 R32.2 | length 5.6
  Top Layer w0.2: P3.8@56.388,48.5 59.534,45.354 R32.2@60.675,45.354
Cell-33: P3.9 R36.2 | length 3.9
  Top Layer w0.2: P3.9@53.848,48.5 53.848,47.181 55.6,45.429 55.6,45.379 55.625,45.354 R36.2@55.675,45.354
Cell-34: P3.10 R40.2 | length 3.4
  Top Layer w0.2: R40.2@50.639,45.354 50.639,47.613 51.308,48.282 P3.10@51.308,48.5
Cell-35: P3.11 R44.2 | length 4.9
  Top Layer w0.2: R44.2@46.883,45.45 48.651,45.45 48.768,45.567 P3.11@48.768,48.5
Cell-36: P3.12 R48.2 | length 5.7
  Top Layer w0.2: R48.2@41.984,45.481 43.576,45.481 45.815,47.72 45.815,47.746 46.19,48.121 P3.12@46.19,48.5
Cell-37: P3.13 R5.2 | length 8.2
  Top Layer w0.2: R5.2@36.741,45.446 40.112,45.446 42.898,48.232 43.42,48.232 P3.13@43.688,48.5
Cell-38: P3.14 R9.2 | length 10.6
  Top Layer w0.2: R9.2@31.86,45.45 35.395,45.45 35.915,45.971 38.619,45.971 P3.14@41.148,48.5
Cell-39: P3.15 R13.2 | length 13.1
  Top Layer w0.2: R13.2@26.83,45.4 30.26,45.4 31.284,46.425 36.533,46.425 P3.15@38.608,48.5
Cell-40: P3.16 R17.2 | length 15.5
  Top Layer w0.2: R17.2@21.794,45.45 25.384,45.45 25.863,45.929 30.147,45.929 31.096,46.879 34.447,46.879 P3.16@36.068,48.5
Cell-41: P3.17 R21.2 | length 18
  Top Layer w0.2: R21.2@16.794,45.45 20.177,45.45 21.11,46.383 29.959,46.383 30.921,47.346 31.466,47.346 32.428,48.308 33.336,48.308 P3.17@33.528,48.5
Cell-42: P3.18 R25.2 | length 20.5
  Top Layer w0.2: R25.2@11.726,45.4 15.174,45.4 16.611,46.837 29.325,46.837 P3.18@30.988,48.5
Cell-43: P3.19 R29.2 | length 23
  Top Layer w0.2: R29.2@6.773,45.4 10.221,45.4 12.167,47.346 27.294,47.346 P3.19@28.448,48.5
Cell-44: P3.20 R33.2 | length 25.4
  Top Layer w0.2: R33.2@1.793,45.45 5.318,45.45 8.368,48.5 P3.20@25.908,48.5
Cell-45: P2.1 R37.2 | length 3.3
  Top Layer w0.2: P2.1@1.5,28.81 1.5,28.885 R37.2@3.811,31.196
Cell-46: P2.2 R41.2 | length 2.4
  Top Layer w0.2: P2.2@1.5,26.27 1.672,26.098 3.609,26.098 R41.2@3.73,25.977
Cell-47: P2.3 R45.2 | length 2.8
  Top Layer w0.2: P2.3@1.5,23.73 1.58,23.65 2.6,23.65 3.555,22.695 3.605,22.695 3.73,22.57 R45.2@3.73,22.52
Cell-48: P2.4 R49.2 | length 4.6
  Top Layer w0.2: P2.4@1.5,21.19 1.5,19.749 3.73,17.518 R49.2@3.73,17.473